# Altium PCB PCB_WeatherStation.PcbDoc (part 1 of 3)
Units mil, origin at the board's own origin, x right, y up, seen from the top; angles counter-clockwise.
Board outline 3900 x 3900 mil, 2 copper layers (Top Layer, Bottom Layer); 99 components, 57 nets, 297 pads, 308 vias.
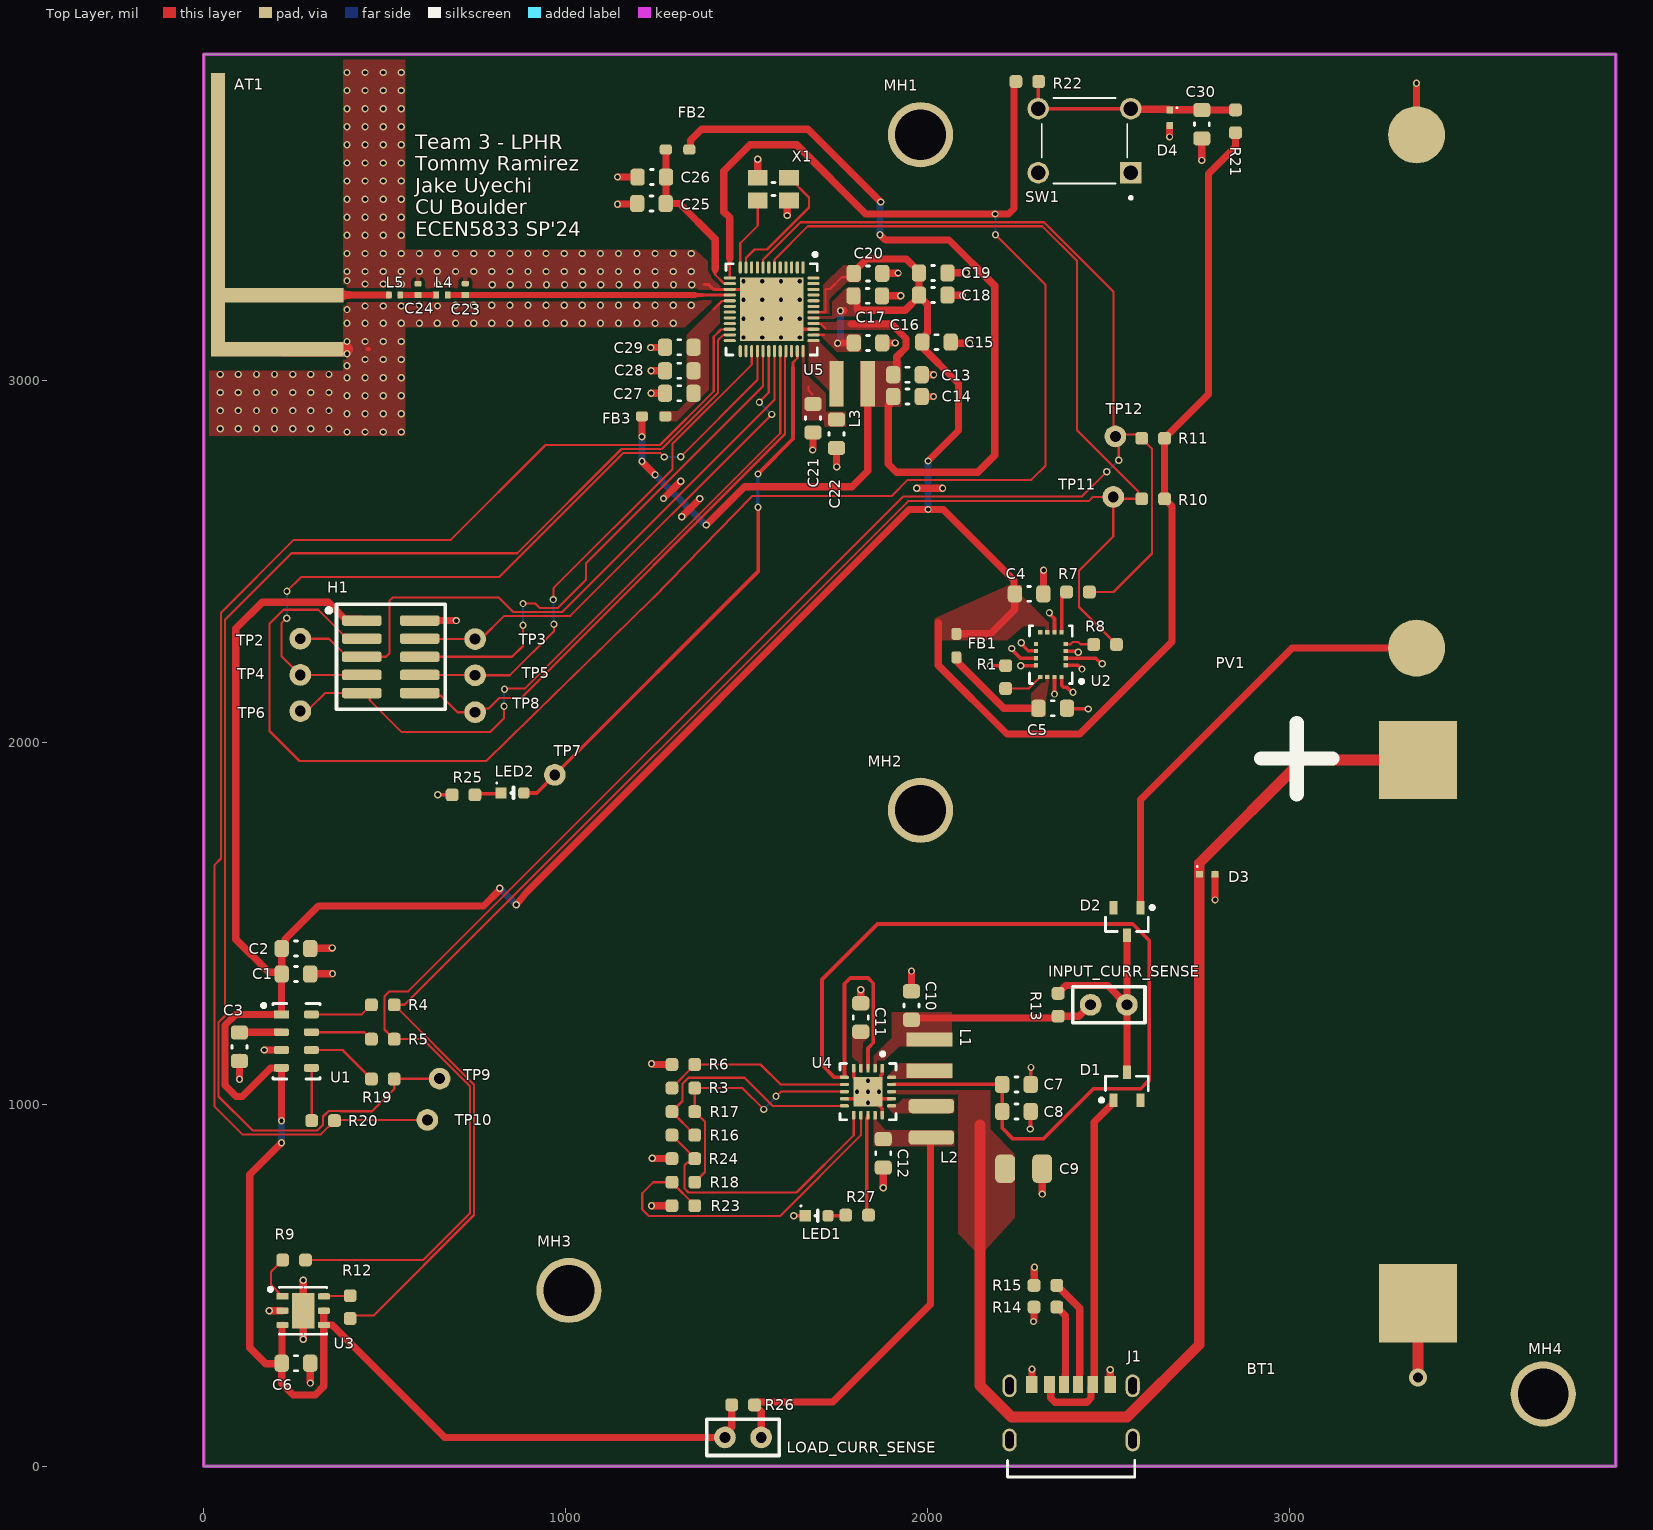
[diagram p0: Top Layer view]
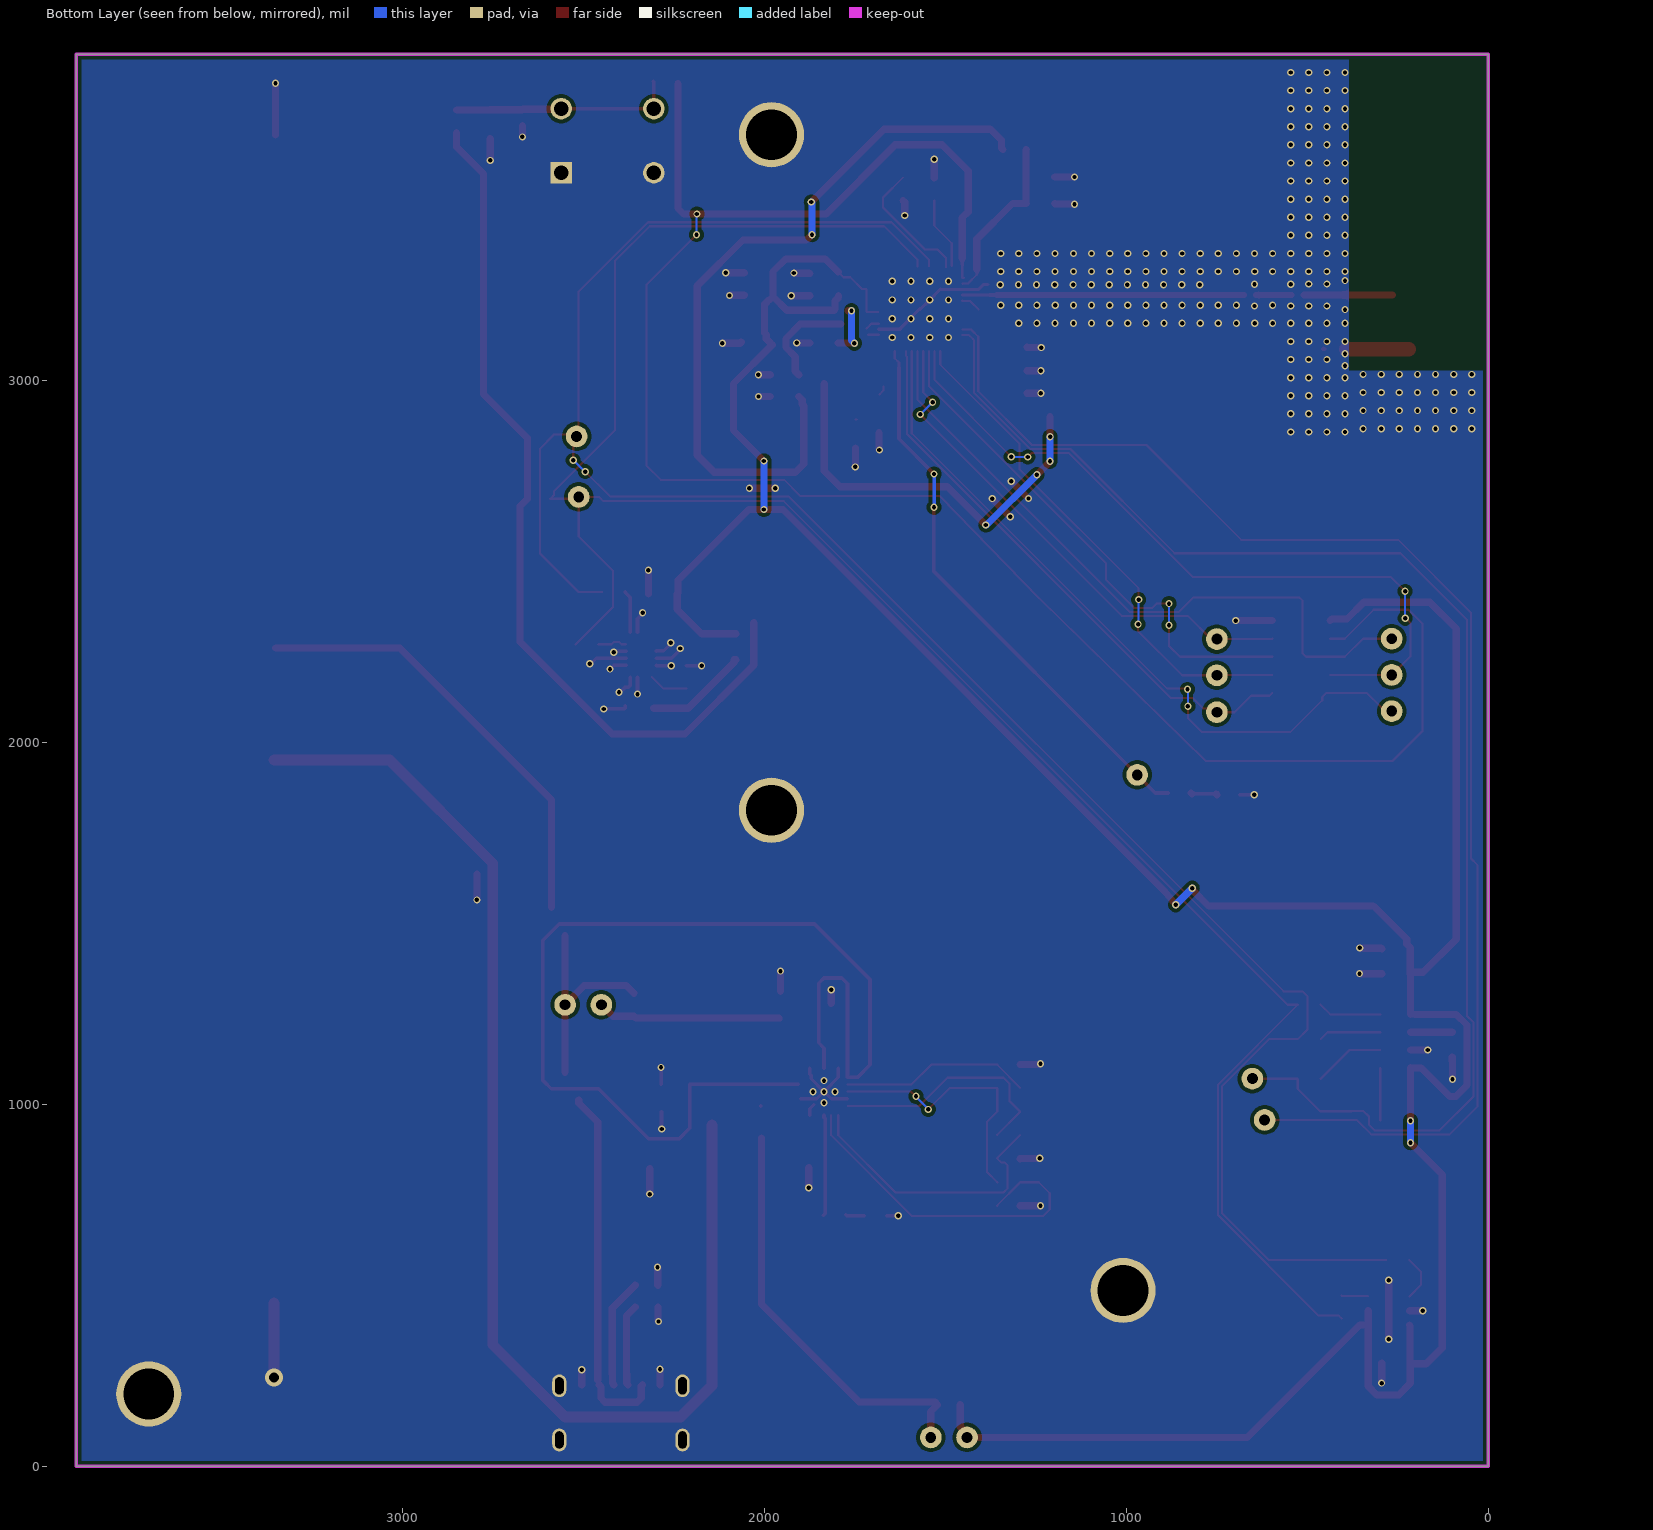
[diagram p1: Bottom Layer view, seen from below]
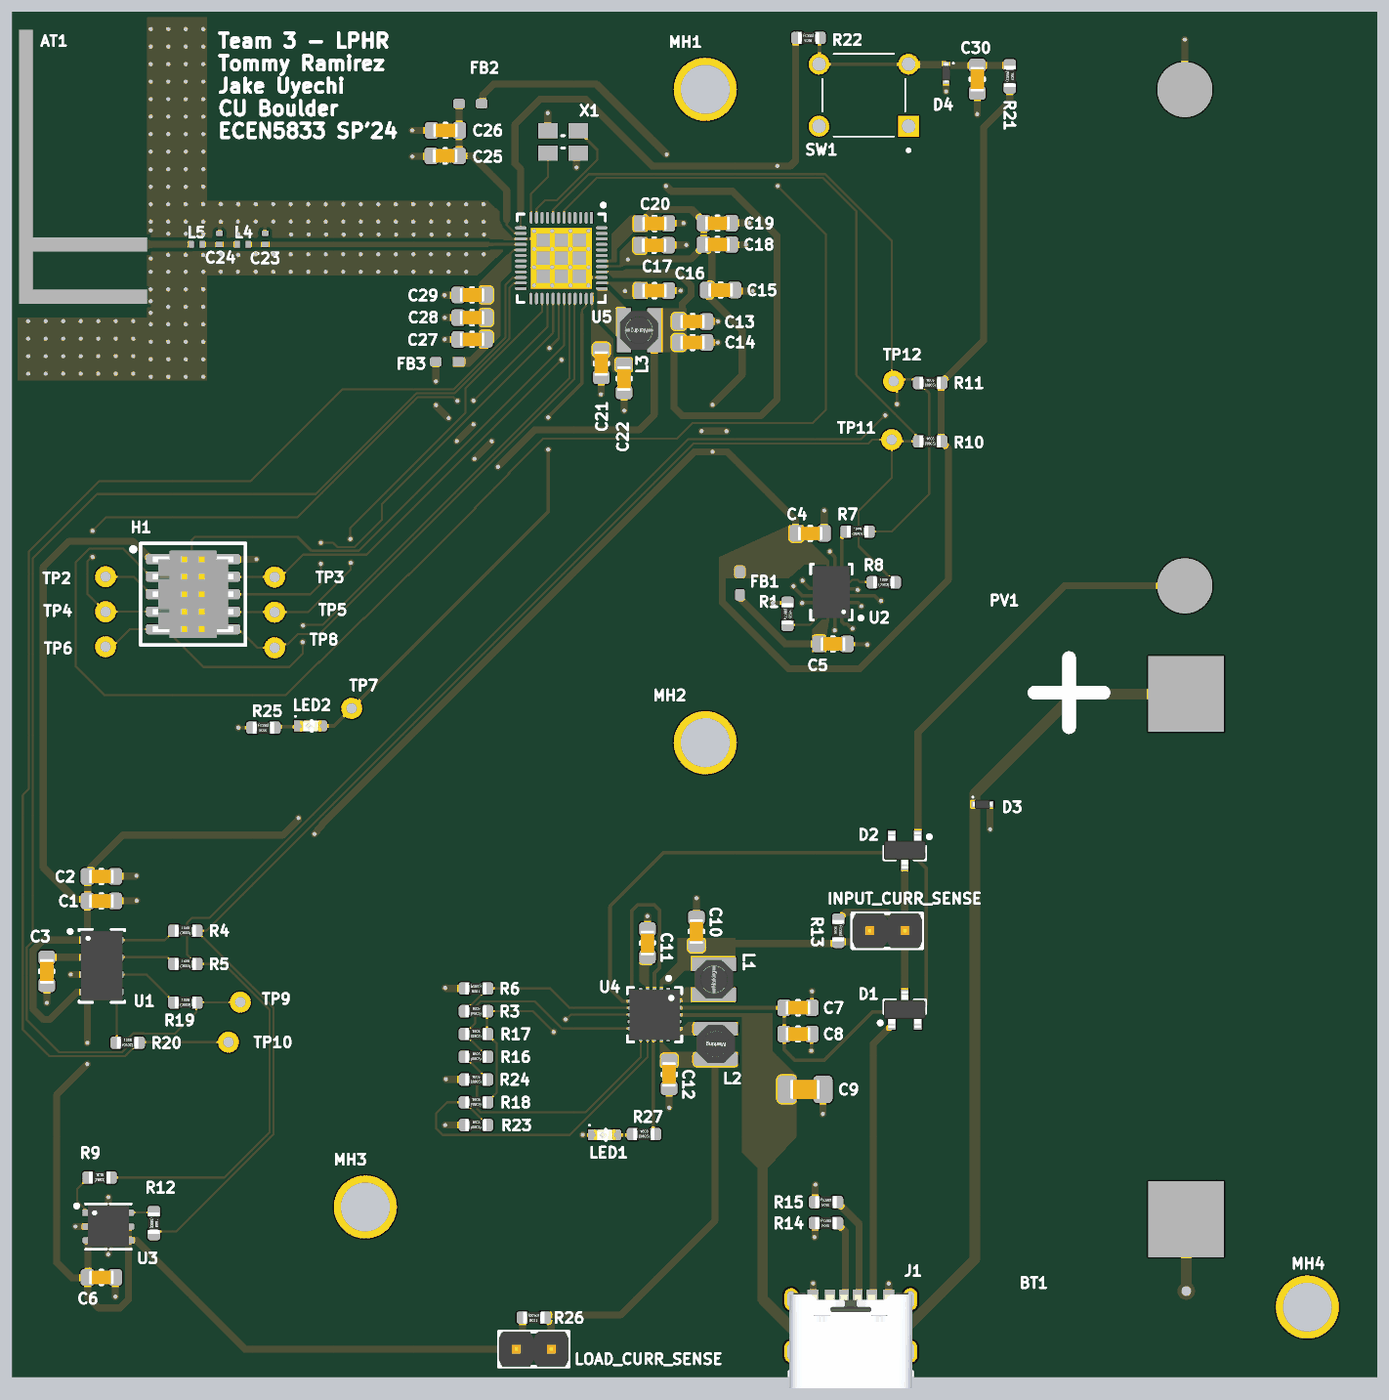
[diagram p3: 3D render of the assembled board from above, using the file's embedded part models]

## Layer stack, top to bottom
Top Solder: solder mask 0.4, Solder Resist, Dk 3.5
Top Layer: signal copper 1.4
Dielectric 1: dielectric 12.6, FR-4, Dk 4.8
Bottom Layer: signal copper 1.4
Bottom Solder: solder mask 0.4, Solder Resist, Dk 3.5

## Board outline
0,0 3900,0 3900,3900 0,3900

## Design rules (kind name [scope] priority, off if disabled: settings)
Clearance "Stitching No Net" [IsStitchingVia and InNet('No Net') vs (IsVia and (Not IsStitchingVia)) Or IsPad] p1: gap=50 ignorepadtopadclearanceinfootprint=FALSE
Clearance Clearance_1 [All] p2: gap=10 ignorepadtopadclearanceinfootprint=TRUE except(0: Arc-Hole Hole-Hole; 5: Track-Track; 5.91: Text-Hole; 6: Arc-Track Arc-SMDPad Arc-THPad Arc-Via Track-SMDPad Track-THPad; 19.68: SMDPad-THPad THPad-THPad Via-Hole)
Clearance Clearance_1 [OnMid vs OnMid] p3: gap=10 ignorepadtopadclearanceinfootprint=FALSE sourcerule=41 cellrowname=All cellrowtype=0 cellcolname=All cellcoltype=0 innerlayers=TRUE
Clearance Clearance_2 [(ExistsOnLayer('Top Layer') Or ExistsOnLayer('Bottom Layer')) vs (ExistsOnLayer('Top Layer') Or ExistsOnLayer('Bottom Layer'))] p4: gap=10 ignorepadtopadclearanceinfootprint=FALSE sourcerule=41 cellrowname=All cellrowtype=0 cellcolname=All cellcoltype=0 outerlayers=TRUE
Clearance [All] p5: gap=10 ignorepadtopadclearanceinfootprint=FALSE ismatrix=TRUE
HoleSize [All] p1: absolutevalues=TRUE maxlimit=140 minlimit=1 maxpercent=80.000 minpercent=20.000
MinimumSolderMaskSliver [All] p1: minsoldermaskwidth=3.94
NetAntennae [All] p1: netantennaetolerance=100
PolygonConnect PolygonConnectStyle_1 [IsNamedPolygon('GND_L01_P009')] p1: thpad.connectstyle=Relief thpad.reliefconductorwidth=10 thpad.reliefentries=2 thpad.polygonreliefangle="0 Angle" thpad.airgapwidth=10 smdpad.connectstyle=Relief smdpad.reliefconductorwidth=10 smdpad.reliefentries=2 smdpad.polygonreliefangle="0 Angle" smdpad.airgapwidth=10 via.connectstyle=Direct via.reliefconductorwidth=10 via.reliefentries=2 via.polygonreliefangle="0 Angle" via.airgapwidth=10
PolygonConnect [All] p2: connectstyle=Direct reliefconductorwidth=10 reliefentries=4 polygonreliefangle="90 Angle" airgapwidth=10
RoutingVias RoutingViaStyle_1 [All] p1: holewidth=12 width=20 viastyle="Through Hole" minholewidth=12 minwidth=20 maxholewidth=12 maxwidth=20
RoutingVias [All] p2: holewidth=28 width=50 viastyle="Through Hole" minholewidth=28 minwidth=50 maxholewidth=28 maxwidth=50
ShortCircuit [All] p1: allowed=TRUE
SilkToSolderMaskClearance [IsPad] p1: minsilkscreentomaskgap=5.91 clearancetoexposedcopper=TRUE
SolderMaskExpansion [All] p1: expansion=4 istentingtop=FALSE
Width MaxMinWidth_1 [All] p1: maxlimit=50 minlimit=5 preferedwidth=10 minimp=50.000000 maximp=50.000000 favimp=50.000000
Width [All] p2: maxlimit=10 minlimit=10 preferedwidth=10
25 further rules are at their usual default settings.

## Classes and differential pairs
component class Si7021: C6 R9 R12 U3
component class MPL3115A2: C1 C2 C3 R4 R5 R19 R20 U1
component class EFR32BG24_PartC: H1 LED2 MH1 MH2 MH3 MH4 R10 R11 R25 TP2 TP3 TP4 TP5 TP6 TP7 TP8 TP9 TP10 TP11 TP12
component class EFR32BG24_PartB: C13 C14 C15 C16 C17 C18 C19 C20 C21 C22 C30 D4 L3 R21 R22 SW1
component class EFR32BG24_PartA: AT1 C23 C24 C25 C26 C27 C28 C29 FB2 FB3 L4 L5 U5 X1
component class BQ25570: BT1 C7 C8 C9 C10 C11 C12 D1 D2 D3 INPUT_CURR_SENSE J1 L1 L2 LED1 LOAD_CURR_SENSE PV1 R3 R6 R13 R14 R15 R16 R17 R18 R23 R24 R26 R27 U4
component class AS7331: C4 C5 FB1 R1 R7 R8 U2

## Components (designator, comment, footprint, x,y, rotation, side; value= is the part's Value field where it differs from the comment)
AT1 "Inverted F" F_ANT 386,3066 r90 top
BT1 "3.7V" BT_25.4MMCOINCELL 3354,1201 r270 top
C1 "0.1uF" C_0603 255,1360 r0 top
C2 "1uF" C_0603 255,1430 r180 top
C3 "0.1uF" C_0603 99,1159 r270 top
C4 "0.1uF" C_0603 2280,2410 r180 top
C5 "0.1uF" C_0603 2345,2094 r0 top
C6 "0.1uF" C_0603 255,285 r0 top
C7 "4.7uF" C_0603 2245,1055 r0 top
C8 "10nF" C_0603 2245,980 r0 top
C9 "100uF" C_0805 2265,822 r0 top
C10 "4.7uF" C_0603 1955,1273 r90 top
C11 "10nF" C_0603 1815,1240 r90 top
C12 "22uF" C_0603 1877,864.63 r270 top
C13 "4.7uF" C_0603 1944,3015 r0 top
C14 "0.1uF" C_0603 1944,2955 r0 top
C15 "10uF" C_0603 2024,3105 r0 top
C16 "0.1uF" C_0603 1835,3103 r180 top
C17 "1uF" C_0603 1834,3233 r180 top
C18 "10nF" C_0603 2015,3235 r0 top
C19 "1uF" C_0603 2015,3296 r180 top
C20 "0.1uF" C_0603 1835,3295 r180 top
C21 "0.1uF" C_0603 1683.04,2895 r270 top
C22 "1uF" C_0603 1748,2852 r270 top
C23 "2.3pF" C_0402 722.78,3251 r90 top
C24 "1.6pF" C_0402 592.27,3251 r90 top
C25 "18pF" C_0603 1237,3488 r180 top
C26 "2.2uF" C_0603 1238,3561 r180 top
C27 "1uF" C_0603 1314,2964 r180 top
C28 "18pF" C_0603 1314,3026 r180 top
C29 "0.5pF" C_0603 1314,3091 r180 top
C30 "0.1uF" C_0603 2757,3707 r270 top
D1 "200mA" SOT95P237X111-3N 2550,1050 r90 top
D2 "200mA" SOT95P237X111-3N 2550,1505 r270 top
D3 "TVS 12V 7A" D_TVS 2772,1636 r0 top value=30pF
D4 "TVS 12V 7A" D_TVS 2668,3725 r270 top value=30pF
FB1 "70 Ohms @ 100 MHz" FB_0603 2079,2267 r270 top
FB2 "70 Ohms @ 100 MHz" FB_0603 1309,3637 r180 top
FB3 "70 Ohms @ 100 MHz" FB_0603 1243,2900 r0 top
H1 "Mini SWD" FTSH-105-01-XXX-DV-K 517,2236 r270 top
INPUT_CURR_SENSE "Input Current Sense" TP_2PIN_MALE 2500,1275 r180 top
J1 "Female USB Type C" GCT_USB4125-GF-A_REVA2 2395.92,104.5 r0 top
L1 "22uF" L_2828X30 2005,1136 r270 top
L2 "10u" L_2828_15 2010,951.69 r270 top
L3 "2.2uH" L_2828X30 1791,2990 r0 top
L4 "2.9uH" L_0402#1 658.63,3235.25 r180 top
L5 "1.2uH" L_0402#2 527.63,3235.25 r180 top
LED1 "GRN" LED_0603 1693,692 r0 top
LED2 "GRN" LED_0603 852.86,1859.94 r0 top
LOAD_CURR_SENSE "Load Current Sense" TP_2PIN_MALE 1490,80 r180 top
MH1 "#4 Hole" HOLE_#4#1 1966,3678 r0 top
MH2 "#4 Hole" HOLE_#4#2 1921,1812 r0 top
MH3 "#4 Hole" HOLE_#4#3 1009,486 r0 top
MH4 "#4 Hole" HOLE_#4#4 3709,177 r0 top
PV1 "4.15V" PV_CUSTOM 3350,2968.66 r90 top
R1 "3.3MΩ" R_0603 2215,2180 r270 top value=3.3MR
R3 "7.32 M" R_0603 1325,1045 r0 top value=7.32MR
R4 "0Ω" R_0603 495,1275 r0 top value=0R
R5 "0Ω" R_0603 495,1180 r0 top value=0R
R6 "5.62M" R_0603 1325,1110 r180 top value=5.62MR
R7 "0Ω" R_0603 2415,2415 r0 top value=0R
R8 "0Ω" R_0603 2490,2270 r0 top value=0R
R9 "0Ω" R_0603 250,570 r0 top value=0R
R10 "4.7k" R_0603 2622.5,2672.5 r0 top value=4.7kR
R11 "4.7k" R_0603 2622.5,2839.5 r0 top value=4.7kR
R12 "0Ω" R_0603 405,440 r270 top value=0R
R13 "500m" R_0603 2360,1275 r90 top value=500mR
R14 "5k1" R_0603 2325,440 r180 top value=5.1kR
R15 "5k1" R_0603 2325,500 r180 top value=5.1kR
R16 "7.5M" R_0603 1325,915 r0 top value=7.5MR
R17 "1.4M" R_0603 1325,980 r0 top value=1.4MR
R18 "8.25M" R_0603 1325,785 r0 top value=8.25MR
R19 "0Ω" R_0603 495,1070 r0 top value=0R
R20 "0Ω" R_0603 330,955 r0 top value=0R
R21 "47k" R_0603 2850,3715 r270 top value=47kR
R22 "140Ω" R_0603 2275,3825 r180 top value=140R
R23 "4.75M" R_0603 1325,720 r0 top value=4.75MR
R24 "4.32M" R_0603 1325,850 r0 top value=4.32MR
R25 "820Ω" R_0603 717.86,1854.94 r180 top value=820R
R26 "500m" R_0603 1490,170 r180 top value=500mR
R27 "820Ω" R_0603 1805,694 r0 top value=820R
SW1 "SW_TactilePushButton" SW_TACTILE 2437.95,3651.42 r180 top
TP2 "TP_1PIN_Hole" "Test Point"#1 267,2286 r90 top
TP3 "TP_1PIN_Hole" "Test Point"#2 749,2285 r90 top
TP4 "TP_1PIN_Hole" "Test Point"#1 267,2186 r90 top
TP5 "TP_1PIN_Hole" "Test Point"#2 749,2185 r90 top
TP6 "TP_1PIN_Hole" "Test Point"#1 267,2086 r90 top
TP7 "TP_1PIN_Hole" "Test Point"#1 970,1910 r90 top
TP8 "TP_1PIN_Hole" "Test Point"#3 745,2083 r90 top
TP9 "TP_1PIN_Hole" "Test Point"#1 652,1071 r90 top
TP10 "TP_1PIN_Hole" "Test Point"#1 618.01,956.79 r90 top
TP11 "TP_1PIN_Hole" "Test Point"#1 2512.5,2677.5 r90 top
TP12 "TP_1PIN_Hole" "Test Point"#1 2518.17,2844.67 r90 top
U1 "MPL3115A2" U_MPL3115A2 256.34,1174.61 r0 top
U2 "AS7331" U_AS7331 2340.16,2242.01 r180 top
U3 "SI7021-A20-GM1R" U_SI7021 275,430 r0 top
U4 "Buck Boost" U_20QFN_3.5X3.5 1835,1035 r270 top
U5 "EFR32BG24B110F1536IM48-B" U_48QFN_6X6_2 1568.86,3195.82 r270 top
X1 "38.4MHz" "33MHZ CRYSTAL" 1573.86,3527.94 r0 top

## Footprints (in the part's own frame and the unit in brackets; to place one, negate y for a bottom-side part, rotate by r counter-clockwise, add the part's x,y. Pads: shape width x height; smd on the part's side, far side on the other; paste and mask are expansions set on the pad)
"33MHZ CRYSTAL" [mm]
  rect 1.4x1.1 smd mask+0.06: 1(-1.1,-0.8) 3(1.1,0.8) 4(-1.1,0.8)
  rect 1.4x1.1 smd paste+0 mask+0.06: 2(1.1,-0.8)
  silkscreen extent -0.1,-0.45 0.1,0.45, body extent -1.7,-1.35 1.7,1.35, height 0.8
BT_25.4MMCOINCELL [mm]
  rect 5.5x5.5 smd: 1(-19.05,0) 2(19.05,0)
  silkscreen extent -21.65,-11 -16.65,-6
C_0402 [mm]
  rect 0.4x0.5 smd mask+0.06: 1(-0.4,0)
  rrect50% 0.4x0.5 smd mask+0.06: 2(0.4,0)
  body extent -0.53,-0.28 0.53,0.28, height 0.55
C_0603 [mm] "Chip Capacitor, 2-Leads, Body 1.60x0.80mm, IPC Medium Density"
  rrect50% 1x1.2 smd: 1(-1,0) 2(1,0)
  silkscreen extent -0.1,-0.53 0.1,0.53, body extent -0.9,-0.5 0.9,0.5, height 1
C_0805 [mm] "Chip Capacitor, 2-Leads, Body 2.00x1.25mm, IPC Medium Density"
  rrect50% 1.4x2 smd: 1(-1.3,0) 2(1.3,0)
  body extent -1.07,-0.7 1.07,0.7, height 1.4
D_TVS [mm] "SODFL, 2-Leads, Body 0.60x1.40mm, IPC Medium Density"
  rect 0.5x0.45 smd: 1(-0.55,0) 2(0.55,0)
  silkscreen extent -0.75,0.48 -0.65,0.57, body extent -0.7,-0.33 0.7,0.33, height 0.65
F_ANT [mil]
  rect 40x331 smd mask+4: FEED(169,165.5) GND(20,165.5)
  rect 782x39 smd mask+4: GND(391,346.5)
FB_0603 [mm]
  rrect50% 0.85x0.7 smd mask+0.06: 1(-0.825,0) 2(0.825,0)
  body extent -0.87,-0.48 0.87,0.48, height 0.65
FTSH-105-01-XXX-DV-K [mil]
  rrect50% 29x110 smd mask+2: 1(-100,-80) 2(-100,80) 3(-50,-80) 4(-50,80) 5(0,-80) 6(0,80) 7(50,-80) 8(50,80) 9(100,-80) 10(100,80)
  silkscreen extent -145,-177 145,150, body extent -125,-115 125,115, height 241
GCT_USB4125-GF-A_REVA2 [mm]
  rect 0.7x1.2 smd mask+0.051: A5(-0.5,3.08) B5(0.5,3.08)
  rect 0.76x1.2 smd mask+0.051: A9(1.52,3.08) B9(-1.52,3.08)
  rect 0.8x1.2 smd mask+0.051: A12(2.75,3.08) B12(-2.75,3.08)
  oval 1x1.6 hole 0.6 slot 1.2 at 90 deg mask+0: S1(-4.32,3) S2(4.32,3) S3(-4.32,-0.8) S4(4.32,-0.8)
  silkscreen extent -4.47,-3.4 4.47,-2.25, body extent -4.47,-3.45 4.47,3.45, height 3.26
HOLE_#4#1 [mil]
  round 180 hole 140: 1(14,0)
HOLE_#4#2 [mil]
  round 180 hole 140: 1(59,0)
HOLE_#4#3 [mil]
  round 180 hole 140: 1(0,0)
HOLE_#4#4 [mil]
  round 180 hole 140: 1(-9,23)
L_0402#1 [mm]
  rect 0.4x0.5 smd mask+0.06: 1(-0.4,0) 2(0.4,0)
  body extent -0.53,-0.28 0.53,0.28, height 0.55
L_0402#2 [mm]
  rect 0.4x0.5 smd mask+0.06: 1(-0.4,0)
  rrect50% 0.4x0.5 smd mask+0.06: 2(0.4,0)
  body extent -0.53,-0.28 0.53,0.28, height 0.55
L_2828_15 [mm]
  rrect50% 1x3.2 smd: 1(-1.1,0) 2(1.1,0)
  body extent -1.39,-1.39 1.39,1.39, height 1.2
L_2828X30 [mm]
  rect 1x3.2 smd: 1(-1.1,0) 2(1.1,0)
  body extent -1.4,-1.4 1.4,1.4, height 2.8
LED_0603 [mm] "SODFL, 2-Leads, Body 0.80x1.80mm, IPC Medium Density"
  rrect50% 0.8x0.8 smd: A(0.8,0)
  rect 0.8x0.8 smd: C(-0.8,0)
  silkscreen extent -1.15,-0.38 0.08,0.75, body extent -0.8,-0.4 0.8,0.4, height 0.71
PV_CUSTOM [mm] "Solar Panel"
  round 4 smd: 1(-18,0) 2(18,0)
R_0603 [mm] "Chip Resistor, 2-Leads, Body 1.60x0.80mm, IPC Medium Density"
  rrect50% 0.9x0.9 smd: 1(-0.8,0) 2(0.8,0)
  body extent -0.78,-0.43 0.77,0.42, height 0.45
SOT95P237X111-3N [mm] "SOT23, 3-Leads, Body 2.92x2.37mm, Pitch 0.95mm, IPC Medium Density"
  rect 0.95x0.56 smd: 1(-0.975,0.95) 2(-0.975,-0.95) 3(0.975,0)
  silkscreen extent -1.1,-1.5 0.7,1.9, body extent -1.32,-1.52 1.32,1.52, height 1.11
SW_TACTILE [mm] "Tactile, 4-pin pushbutton w/ through hole leads"
  rect 1.508x1.508 / inner round 1.508 / far side rect 1.508x1.508 hole 1: 1(-3.123,1.996)
  round 1.508 hole 1: 2(3.377,1.996) 3(-3.123,-2.504) 4(3.377,-2.504)
  silkscreen extent -3.22,-3.25 3.13,3.85
"Test Point"#1 [mil] "200 mil hole"
  round 60 hole 30: 1(0,0)
"Test Point"#2 [mil] "200 mil hole"
  round 60 hole 30: 1(0,-1)
"Test Point"#3 [mil] "200 mil hole"
  round 60 hole 30: 1(0,-5)
TP_2PIN_MALE [mil] "2-pin, standard male header, 2.54mm pitch"
  round 60 hole 30: 1(-50,0) 2(50,0)
  silkscreen extent -100,-50 100,50, body extent -100,-50 100,50, height 286
U_20QFN_3.5X3.5 [mm] "QFN Buckboost"
  rect 0.6x0.24 smd mask+0.07: 1(-1.65,1)
  rrect50% 0.6x0.24 smd mask+0.07: 2(-1.65,0.5) 3(-1.65,0) 4(-1.65,-0.5) 5(-1.65,-1) 11(1.65,-1) 12(1.65,-0.5) 13(1.65,0) 14(1.65,0.5) 15(1.65,1)
  rrect50% 0.24x0.6 smd mask+0.07: 6(-1,-1.65) 7(-0.5,-1.65) 8(0,-1.65) 9(0.5,-1.65) 10(1,-1.65) 16(1,1.65) 17(0.5,1.65) 18(0,1.65) 19(-0.5,1.65) 20(-1,1.65)
  rect 2.05x2.05 smd paste-1 mask+0.07: 21(0,0)
  silkscreen extent -2.77,-1.98 1.98,1.98, body extent -1.83,-1.83 1.83,1.83, height 1
U_48QFN_6X6_2 [mm]
  rect 0.86x0.22 smd mask+0.04: 1(-2.935,2.2)
  oval 0.86x0.22 smd mask+0.04: 2(-2.935,1.8) 3(-2.935,1.4) 4(-2.935,1) 5(-2.935,0.6) 6(-2.935,0.2) 7(-2.935,-0.2) 8(-2.935,-0.6) 9(-2.935,-1) 10(-2.935,-1.4) 11(-2.935,-1.8) 12(-2.935,-2.2) 25(2.935,-2.2) 26(2.935,-1.8) 27(2.935,-1.4) 28(2.935,-1) 29(2.935,-0.6) 30(2.935,-0.2) 31(2.935,0.2) 32(2.935,0.6) 33(2.935,1) 34(2.935,1.4) 35(2.935,1.8) 36(2.935,2.2)
  oval 0.22x0.86 smd mask+0.04: 13(-2.2,-2.935) 14(-1.8,-2.935) 15(-1.4,-2.935) 16(-1,-2.935) 17(-0.6,-2.935) 18(-0.2,-2.935) 19(0.2,-2.935) 20(0.6,-2.935) 21(1,-2.935) 22(1.4,-2.935) 23(1.8,-2.935) 24(2.2,-2.935) 37(2.2,2.935) 38(1.8,2.935) 39(1.4,2.935) 40(1,2.935) 41(0.6,2.935) 42(0.2,2.935) 43(-0.2,2.935) 44(-0.6,2.935) 45(-1,2.935) 46(-1.4,2.935) 47(-1.8,2.935) 48(-2.2,2.935)
  rect 4.45x4.45 smd paste-2539.97 mask+0.04: 49(0,0)
  silkscreen extent -3.97,-3.2 3.2,3.2, body extent -3.05,-3.05 3.05,3.05, height 0.9
U_AS7331 [mm] "QFN, 16-Leads, Body 2.60x3.65mm, Pitch 0.50mm, IPC Medium Density"
  rect 0.3x0.3 smd mask+0.048: 1(-0.75,1.575) 2(-0.25,1.575) 3(0.25,1.575) 4(0.75,1.575) 5(1.05,0.75) 6(1.05,0.25) 7(1.05,-0.25) 8(1.05,-0.75) 9(0.75,-1.575) 10(0.25,-1.575) 11(-0.25,-1.575) 12(-0.75,-1.575) 13(-1.05,-0.75) 14(-1.05,-0.25) 15(-1.05,0.25) 16(-1.05,0.75)
  silkscreen extent -2.28,-2.02 1.5,2.02, body extent -1.35,-1.88 1.35,1.88, height 1.19
U_MPL3115A2 [mm] "QFN, 8-Leads, Body 3.00x5.00mm, Pitch 0.00mm/1.25mm, IPC Medium Density"
  rect 1.05x0.55 smd mask+0.07: 1(-1.05,1.875)
  rrect50% 1.05x0.55 smd mask+0.07: 2(-1.05,0.625) 3(-1.05,-0.625) 4(-1.05,-1.875) 5(1.05,-1.875) 6(1.05,-0.625) 7(1.05,0.625) 8(1.05,1.875)
  silkscreen extent -2.42,-2.65 1.65,2.65, body extent -1.5,-2.5 1.5,2.5, height 1.1
U_SI7021 [mm] "QFN, 6-Leads, Body 3.00x3.00mm, Pitch 1.00mm, Thermal Pad 1.60x2.50mm, IPC Medium Density"
  rect 0.85x0.45 smd mask+0.062: 1(-1.45,1)
  rrect50% 0.85x0.45 smd mask+0.062: 2(-1.45,0) 3(-1.45,-1) 4(1.45,-1) 5(1.45,0) 6(1.45,1)
  rect 1.6x2.5 smd mask+0.062: Paddle(0,0)
  silkscreen extent -2.42,-1.65 1.65,1.65, body extent -1.5,-1.5 1.5,1.5, height 1.21

## Part data
AT1: library part Antenna
BT1: library part BT_CoinCell_25.4mm, "BATTERY HOLDER COIN 24.5MM SMD", Manufacturer="Memory Protection Devices", Manufacturer Part Number=BU2450SM-JJ-GTR, Supplier Part Number=BU2450SM-JJ-GCT-ND, Category=Uncategorized, ComponentLink1Description=https://datasheet.ciiva.com/4/bu2450sm-jj-gtr-datasheet-4338.pdf?src-supplier=Digikey, ComponentLink1URL=https://datasheet.ciiva.com/4/bu2450sm-jj-gtr-datasheet-4338.pdf?src-supplier=Digikey, ComponentLink2Description=https://datasheet.ciiva.com/4/bu2450sm-jj-gtr-datasheet-4339.pdf?src-supplier=Digikey, ComponentLink2URL=https://datasheet.ciiva.com/4/bu2450sm-jj-gtr-datasheet-4339.pdf?src-supplier=Digikey, ComponentLink3Description=https://datasheet.ciiva.com/4/bu2450sm-jj-gtr-datasheet-4340.pdf?src-supplier=Digikey, ComponentLink3URL=https://datasheet.ciiva.com/4/bu2450sm-jj-gtr-datasheet-4340.pdf?src-supplier=Digikey, Pricing="1=1.72, 10=1.445, 50=1.2702, 100=1.1967 (USD)", RoHS=Yes, Stock=49410, Supplier=Digikey
C1 C3 C4 C5 C6 C14 C16 C20 C21 C30: library part C_0.1U_0603, "CAP CER 0.1UF 10V X5R 0603", Capacitor Type=Ceramic, Manufacturer=KEMET, Manufacturer Part Number=C0603C104K8PAC7867, Supplier Part Number=399-17573-1-ND, Category="Ceramic Capacitors", ComponentLink1Description=https://datasheet.ciiva.com:443/pdfs/VipMasterIC/IC/KEME/KEME-S-A0007617622/KEME-S-A0007611556-1.pdf?src-supplier=IHS+Markit, ComponentLink1URL=https://datasheet.ciiva.com:443/pdfs/VipMasterIC/IC/KEME/KEME-S-A0007617622/KEME-S-A0007611556-1.pdf?src-supplier=IHS+Markit, ComponentLink2Description=https://api.kemet.com/component-edge/download/datasheet/C0603C104K8PAC7867.pdf?src-supplier=Digikey, ComponentLink2URL=https://api.kemet.com/component-edge/download/datasheet/C0603C104K8PAC7867.pdf?src-supplier=Digikey, Dielectric Material=Ceramic, Pins=2, Pricing="1=0.18, 10=0.119, 50=0.075, 100=0.06, 500=0.04332, 1000=0.03833 (USD)", Reach SVHC Compliant=Yes, RoHS=Yes, RoHS Compliant=Yes, Stock=13122, Supplier=Digikey
C2 C17 C19 C22 C27: library part C_1U_0603, "CAP CER 1UF 10V X5R 0603", Capacitor Type=Ceramic, Case/Package=0603, Manufacturer=Murata, Manufacturer Part Number=GRM188R61A105KA61D, Max Operating Temperature=85°C, Min Operating Temperature=-55°C, Package Shape=Rectangular, Package Style=SMTMeter, Rated DC Voltage (URdc)=10V, Supplier Part Number=490-1543-1-ND, Temperature Characteristics Code=X5R, Tolerance  (fill in as +-)=10%, Category="Ceramic Capacitors", ComponentLink1Description=https://psearch.en.murata.com:443/capacitor/product/GRM188R61A105KA61%23.pdf?src-supplier=IHS+Markit, ComponentLink1URL=https://psearch.en.murata.com:443/capacitor/product/GRM188R61A105KA61%23.pdf?src-supplier=IHS+Markit, ComponentLink2Description=https://datasheet.ciiva.com/19476/1857381-19476568.pdf?src-supplier=Jameco, ComponentLink2URL=https://datasheet.ciiva.com/19476/1857381-19476568.pdf?src-supplier=Jameco, ComponentLink3Description=https://datasheet.ciiva.com/18102/getdatasheetpartid-85467-18102910.pdf?src-supplier=Verical, ComponentLink3URL=https://datasheet.ciiva.com/18102/getdatasheetpartid-85467-18102910.pdf?src-supplier=Verical, ComponentLink4Description=https://datasheet.ciiva.com/7719/608985-7719036.pdf?src-supplier=Element14, ComponentLink4URL=https://datasheet.ciiva.com/7719/608985-7719036.pdf?src-supplier=Element14, ComponentLink5Description=https://datasheet.ciiva.com/22706/608985-22706782.pdf?src-supplier=Element14, ComponentLink5URL=https://datasheet.ciiva.com/22706/608985-22706782.pdf?src-supplier=Element14, ComponentLink6Description=https://datasheet.ciiva.com/131/partnumbering-e-01-131742.pdf?src-supplier=Digikey, ComponentLink6URL=https://datasheet.ciiva.com/131/partnumbering-e-01-131742.pdf?src-supplier=Digikey, ComponentLink7Description=https://datasheet.ciiva.com/131/partnumbering-e-01-131741.pdf?src-supplier=Digikey, ComponentLink7URL=https://datasheet.ciiva.com/131/partnumbering-e-01-131741.pdf?src-supplier=Digikey, ComponentLink8Description=https://datasheet.ciiva.com/131/partnumbering-e-01-131743.pdf?src-supplier=Digikey, ComponentLink8URL=https://datasheet.ciiva.com/131/partnumbering-e-01-131743.pdf?src-supplier=Digikey, ComponentLink9Description=https://datasheet.ciiva.com/16199/product-16199724.pdf?src-supplier=Future+Electronics, ComponentLink9URL=https://datasheet.ciiva.com/16199/product-16199724.pdf?src-supplier=Future+Electronics, Dielectric Material=Ceramic, Height=0.8mm, JESD-609 Code=e3, Length=1.6mm, Mounting Technology="Surface Mount", Multilayer=Yes, Packaging="Tape and Reel", Pins=2, Pricing="1=0.12, 10=0.08, 50=0.048, 100=0.0378, 500=0.02794, 1000=0.02313 (USD)", Reach SVHC Compliant=Yes, RoHS=Yes, RoHS Compliant=Yes, Stock=1314759, Supplier=Digikey, Terminal Finish=Nickel, Termination=Wraparound, Tolerance (fill in as +-)=10%, Width=0.8mm
C7 C10 C13: library part C_4.7U_0603, "CAP CER 4.7UF 10V X5R 0603", Capacitor Type=Ceramic, Case/Package=0603, Manufacturer=Murata, Manufacturer Part Number=GRM188R61A475KAAJD, Max Operating Temperature=85°C, Min Operating Temperature=-55°C, Package Shape=Rectangular, Rated DC Voltage (URdc)=10V, Supplier Part Number=490-14373-1-ND, Temperature Characteristics Code=X5R, Tolerance  (fill in as +-)=10%, Category="Ceramic Capacitors", ComponentLink1Description=https://datasheet.ciiva.com:443/pdfs/VipMasterIC/IC/MURE/MURE-S-A0004349797/MURE-S-A0004352595-1.pdf?src-supplier=IHS+Markit, ComponentLink1URL=https://datasheet.ciiva.com:443/pdfs/VipMasterIC/IC/MURE/MURE-S-A0004349797/MURE-S-A0004352595-1.pdf?src-supplier=IHS+Markit, ComponentLink2Description=http://search.murata.co.jp/Ceramy/image/img/A01X/G101/ENG/GRM188R61A475KAAJ-01.pdf?src-supplier=Digikey, ComponentLink2URL=http://search.murata.co.jp/Ceramy/image/img/A01X/G101/ENG/GRM188R61A475KAAJ-01.pdf?src-supplier=Digikey, Dielectric Material=Ceramic, JESD-609 Code=e3, Mounting Technology="Surface Mount", Multilayer=Yes, Packaging="Tape and Reel", Pins=2, Pricing="1=0.38, 10=0.251, 50=0.185, 100=0.1506, 500=0.11888, 1000=0.10039 (USD)", Reach SVHC Compliant=Yes, RoHS=Yes, RoHS Compliant=Yes, Stock=53982, Supplier=Digikey, Terminal Finish=Nickel, Termination=Wraparound, Tolerance (fill in as +-)=10%
C8 C11 C18: library part C_10N_0603, "Ceramic Capacitor, Multilayer, Ceramic, 100V, 10% +Tol, 10% -Tol, X7R, 15% TC, 0.01uF, Surface Mount, 0603", Capacitor Type=Ceramic, Case/Package=0603, Manufacturer=Murata, Manufacturer Part Number=GCM188R72A103KA37D, Max Operating Temperature=125°C, Min Operating Temperature=-55°C, Package Shape=Rectangular, Package Style=SMTMeter, Rated DC Voltage (URdc)=100V, Supplier Part Number=490-4781-6-ND, Temperature Characteristics Code=X7R, Tolerance  (fill in as +-)=10%, Category="Ceramic Capacitors", ComponentLink1Description=https://psearch.en.murata.com:443/capacitor/product/GCM188R72A103KA37%23.pdf?src-supplier=IHS+Markit, ComponentLink1URL=https://psearch.en.murata.com:443/capacitor/product/GCM188R72A103KA37%23.pdf?src-supplier=IHS+Markit, ComponentLink2Description=https://datasheet.ciiva.com/132/product-132908.pdf?src-supplier=Digikey, ComponentLink2URL=https://datasheet.ciiva.com/132/product-132908.pdf?src-supplier=Digikey, ComponentLink3Description=https://datasheet.ciiva.com/132/product-132907.pdf?src-supplier=Digikey, ComponentLink3URL=https://datasheet.ciiva.com/132/product-132907.pdf?src-supplier=Digikey, ComponentLink4Description=https://datasheet.ciiva.com/132/product-132909.pdf?src-supplier=Digikey, ComponentLink4URL=https://datasheet.ciiva.com/132/product-132909.pdf?src-supplier=Digikey, ComponentLink5Description=https://datasheet.ciiva.com/11786/0900766b80ef92d0-11786108.pdf?src-supplier=Rs, ComponentLink5URL=https://datasheet.ciiva.com/11786/0900766b80ef92d0-11786108.pdf?src-supplier=Rs, ComponentLink6Description=https://datasheet.ciiva.com/16497/product-16497251.pdf?src-supplier=Future+Electronics, ComponentLink6URL=https://datasheet.ciiva.com/16497/product-16497251.pdf?src-supplier=Future+Electronics, ComponentLink7Description=https://datasheet.ciiva.com/18183/getdatasheetpartid-178890-18183651.pdf?src-supplier=Verical, ComponentLink7URL=https://datasheet.ciiva.com/18183/getdatasheetpartid-178890-18183651.pdf?src-supplier=Verical, ComponentLink8Description=https://datasheet.ciiva.com/11619/product-11619719.pdf?src-supplier=Avnet, ComponentLink8URL=https://datasheet.ciiva.com/11619/product-11619719.pdf?src-supplier=Avnet, Dielectric Material=Ceramic, Height=0.9mm, JESD-609 Code=e3, Length=1.6mm, Mounting Technology="Surface Mount", Multilayer=Yes, Packaging="Tape and Reel", Pins=2, Pricing="1=0.1, 10=0.038, 50=0.0218, 100=0.0168, 500=0.01268, 1000=0.00996 (USD)", Reach SVHC Compliant=Yes, Reference Standard=AEC-Q200, RoHS=Yes, RoHS Compliant=Yes, Stock=7901608, Supplier=Digikey, Terminal Finish=Nickel, Termination=Wraparound, Tolerance (fill in as +-)=10%, Width=0.8mm
C9: library part C_100U_0805, "CAP CER 100UF 6.3V X5R 0805", Capacitor Type=Ceramic, Case/Package=0805, Manufacturer=Murata, Manufacturer Part Number=GRM21BR60J107ME15L, Max Operating Temperature=85°C, Min Operating Temperature=-55°C, Package Shape=Rectangular, Rated DC Voltage (URdc)=6.3V, Supplier Part Number=490-13981-1-ND, Temperature Characteristics Code=X5R, Tolerance  (fill in as +-)=20%, Category="Ceramic Capacitors", ComponentLink1Description=https://datasheet.ciiva.com:443/pdfs/VipMasterIC/IC/MURE/MURE-S-A0004349797/MURE-S-A0004361963-1.pdf?src-supplier=IHS+Markit, ComponentLink1URL=https://datasheet.ciiva.com:443/pdfs/VipMasterIC/IC/MURE/MURE-S-A0004349797/MURE-S-A0004361963-1.pdf?src-supplier=IHS+Markit, ComponentLink2Description=http://www.farnell.com/datasheets/1957830.pdf?src-supplier=Farnell, ComponentLink2URL=http://www.farnell.com/datasheets/1957830.pdf?src-supplier=Farnell, ComponentLink3Description=https://datasheet.octopart.com/GRM21BR60J107ME15L-Murata-datasheet-48012791.pdf?src-supplier=Element14, ComponentLink3URL=https://datasheet.octopart.com/GRM21BR60J107ME15L-Murata-datasheet-48012791.pdf?src-supplier=Element14, ComponentLink4Description=http://www.farnell.com/datasheets/1957830.pdf?src-supplier=Element14, ComponentLink4URL=http://www.farnell.com/datasheets/1957830.pdf?src-supplier=Element14, ComponentLink5Description=https://search.murata.co.jp/Ceramy/image/img/A01X/G101/ENG/GRM21BR60J107ME15-01.pdf?src-supplier=Digikey, ComponentLink5URL=https://search.murata.co.jp/Ceramy/image/img/A01X/G101/ENG/GRM21BR60J107ME15-01.pdf?src-supplier=Digikey, ComponentLink6Description=https://datasheet.octopart.com/GRM21BR60J107ME15L-Murata-datasheet-62287462.pdf?src-supplier=Future+Electronics, ComponentLink6URL=https://datasheet.octopart.com/GRM21BR60J107ME15L-Murata-datasheet-62287462.pdf?src-supplier=Future+Electronics, ComponentLink7Description=http://www.farnell.com/datasheets/1957830.pdf?src-supplier=Newark, ComponentLink7URL=http://www.farnell.com/datasheets/1957830.pdf?src-supplier=Newark, ComponentLink8Description=https://datasheet.octopart.com/GRM21BR60J107ME15L-Murata-datasheet-165579666.pdf?src-supplier=TME, ComponentLink8URL=https://datasheet.octopart.com/GRM21BR60J107ME15L-Murata-datasheet-165579666.pdf?src-supplier=TME, Dielectric Material=Ceramic, JESD-609 Code=e3, Mounting Technology="Surface Mount", Multilayer=Yes, Packaging="Tape and Reel", Pins=2, Pricing="1=1.15, 10=0.863, 50=0.7874, 100=0.645, 500=0.5148, 1000=0.45423 (USD)", Reach SVHC Compliant=Yes, RoHS=Yes, RoHS Compliant=Yes, Stock=216821, Supplier=Digikey, Terminal Finish=Nickel, Termination=Wraparound, Tolerance (fill in as +-)=20%
C12: library part C_22U_0603, "CAP CER 22UF 10V X5R 0603", Capacitance="22 uF", Case Code - in=0603, Case Code - mm=1608, Dielectric=X5R, Manufacturer=Murata, Manufacturer Part Number=GRM188R61A226ME15D, Maximum Operating Temperature="+ 85 C", Minimum Operating Temperature="- 55 C", Package / Case="0603 (1608 metric)", Supplier Part Number 1=490-10476-1-ND, Tolerance="20 %", Voltage Rating DC="10 VDC", Brand="Murata Electronics", ComponentLink1Description=http://www.farnell.com/datasheets/2047978.pdf?src-supplier=Element14, ComponentLink1URL=http://www.farnell.com/datasheets/2047978.pdf?src-supplier=Element14, Factory Pack Quantity=4000, Height="0.8 mm", Length="1.6 mm", Packaging=Reel, Pricing 1="1=0.33, 10=0.226, 50=0.1506, 100=0.1279, 500=0.0903, 1000=0.079 (USD)", Product="General Type MLCCs", Product Category="Multilayer Ceramic Capacitors MLCC - SMD/SMT", RoHS=True, Series=GRM, Stock 1=849458, Supplier 1=Digi-Key, Termination Style=SMD/SMT, Type="Voltage and Temperature Derating Recommended Product", Unit Weight="0.000222 oz", Width="0.8 mm"
C15: library part C_10U_0603, "CAP CER 10UF 10V X5R 0603", Capacitor Type=Ceramic, Case/Package=0603, Manufacturer=Murata, Manufacturer Part Number=GRM188R61A106ME69D, Max Operating Temperature=85°C, Min Operating Temperature=-55°C, Package Shape=Rectangular, Rated DC Voltage (URdc)=10V, Supplier Part Number=490-10475-1-ND, Temperature Characteristics Code=X5R, Tolerance  (fill in as +-)=20%, Category="Ceramic Capacitors", ComponentLink1Description=https://datasheet.ciiva.com:443/pdfs/VipMasterIC/IC/MURE/MURE-S-A0004349797/MURE-S-A0004352786-1.pdf?src-supplier=IHS+Markit, ComponentLink1URL=https://datasheet.ciiva.com:443/pdfs/VipMasterIC/IC/MURE/MURE-S-A0004349797/MURE-S-A0004352786-1.pdf?src-supplier=IHS+Markit, ComponentLink2Description=http://www.farnell.com/datasheets/1872210.pdf?src-supplier=Farnell, ComponentLink2URL=http://www.farnell.com/datasheets/1872210.pdf?src-supplier=Farnell, ComponentLink3Description=http://www.mouser.com/ds/2/281/c02e-2905.pdf?src-supplier=Mouser, ComponentLink3URL=http://www.mouser.com/ds/2/281/c02e-2905.pdf?src-supplier=Mouser, ComponentLink4Description=https://datasheet.octopart.com/GRM188R61A106ME69D-Murata-datasheet-22122223.pdf?src-supplier=Future+Electronics, ComponentLink4URL=https://datasheet.octopart.com/GRM188R61A106ME69D-Murata-datasheet-22122223.pdf?src-supplier=Future+Electronics, ComponentLink5Description=https://datasheet.octopart.com/GRM188R61A106ME69D-Murata-datasheet-62317187.pdf?src-supplier=Element14, ComponentLink5URL=https://datasheet.octopart.com/GRM188R61A106ME69D-Murata-datasheet-62317187.pdf?src-supplier=Element14, ComponentLink6Description=http://www.farnell.com/datasheets/1872210.pdf?src-supplier=Newark, ComponentLink6URL=http://www.farnell.com/datasheets/1872210.pdf?src-supplier=Newark, ComponentLink7Description=http://www.farnell.com/datasheets/2048014.pdf?src-supplier=Element14, ComponentLink7URL=http://www.farnell.com/datasheets/2048014.pdf?src-supplier=Element14, ComponentLink8Description=https://datasheet.octopart.com/GRM188R61A106ME69D-Murata-datasheet-165579666.pdf?src-supplier=TME, ComponentLink8URL=https://datasheet.octopart.com/GRM188R61A106ME69D-Murata-datasheet-165579666.pdf?src-supplier=TME, Dielectric Material=Ceramic, JESD-609 Code=e3, Mounting Technology="Surface Mount", Multilayer=Yes, Packaging="Tape and Reel", Pins=2, Pricing="1=0.14, 10=0.098, 50=0.0584, 100=0.0459, 500=0.03392, 1000=0.02809 (USD)", Reach SVHC Compliant=Yes, RoHS=Yes, RoHS Compliant=Yes, Stock=841748, Supplier=Digikey, Terminal Finish=Nickel, Termination=Wraparound, Tolerance (fill in as +-)=20%
C23: library part C_2P3_0402, "Ceramic Capacitor, Multilayer, Ceramic, 50V, 4.35% +Tol, 4.35% -Tol, C0G, 30ppm/Cel TC, 0.0000023uF, Surface Mount, 0402", Capacitor Type=Ceramic, Case/Package=0402, Manufacturer=Murata, Manufacturer Part Number=GJM1555C1H2R3BB01D, Max Operating Temperature=125°C, Min Operating Temperature=-55°C, Package Shape=Rectangular, Package Style=SMTMeter, Rated DC Voltage (URdc)=50V, Supplier Part Number=490-GJM1555C1H2R3BB01DCT-ND, Temperature Characteristics Code=C0G, Tolerance  (fill in as +-)=4.35%, Category="Ceramic Capacitors", ComponentLink1Description=https://datasheet.ciiva.com:443/pdfs/VipMasterIC/IC/MURE/MURE-S-A0004378008/MURE-S-A0004382787-1.pdf?src-supplier=IHS+Markit, ComponentLink1URL=https://datasheet.ciiva.com:443/pdfs/VipMasterIC/IC/MURE/MURE-S-A0004378008/MURE-S-A0004382787-1.pdf?src-supplier=IHS+Markit, ComponentLink2Description=https://datasheet.ciiva.com/166/product-166998.pdf?src-supplier=Digikey, ComponentLink2URL=https://datasheet.ciiva.com/166/product-166998.pdf?src-supplier=Digikey, Dielectric Material=Ceramic, Height=0.5mm, JESD-609 Code=e3, Length=1mm, Mounting Technology="Surface Mount", Multilayer=Yes, Packaging="Tape and Reel", Pins=2, Pricing="1=0.1, 10=0.068, 50=0.0406, 100=0.0319, 500=0.02356, 1000=0.01951, 2500=0.01815, 5000=0.01661 (USD)", Reach SVHC Compliant=Yes, RoHS=Yes, RoHS Compliant=Yes, Stock=30945, Supplier=Digikey, Terminal Finish=Nickel, Termination=Wraparound, Tolerance (fill in as +-)=4.35%, Width=0.5mm
C24: library part C_1P6_0402, "Ceramic Capacitor, Multilayer, Ceramic, 50V, 15.62% +Tol, 15.62% -Tol, C0G, 30ppm/Cel TC, 0.0000016uF, Surface Mount, 0402", Capacitor Type=Ceramic, Case/Package=0402, Manufacturer=Murata, Manufacturer Part Number=GJM1555C1H1R6CB01D, Max Operating Temperature=125°C, Min Operating Temperature=-55°C, Package Shape=Rectangular, Package Style=SMTMeter, Rated DC Voltage (URdc)=50V, Supplier Part Number=490-3088-1-ND, Temperature Characteristics Code=C0G, Tolerance  (fill in as +-)=15.62%, Category="Ceramic Capacitors", ComponentLink1Description=https://datasheet.ciiva.com:443/pdfs/VipMasterIC/IC/MURE/MURE-S-A0004378008/MURE-S-A0004382877-1.pdf?src-supplier=IHS+Markit, ComponentLink1URL=https://datasheet.ciiva.com:443/pdfs/VipMasterIC/IC/MURE/MURE-S-A0004378008/MURE-S-A0004382877-1.pdf?src-supplier=IHS+Markit, ComponentLink2Description=https://datasheet.ciiva.com/161/product-161712.pdf?src-supplier=Digikey, ComponentLink2URL=https://datasheet.ciiva.com/161/product-161712.pdf?src-supplier=Digikey, ComponentLink3Description=https://datasheet.ciiva.com/16440/gjm1555c1h1r6cb01d-16440474.pdf?src-supplier=Future+Electronics, ComponentLink3URL=https://datasheet.ciiva.com/16440/gjm1555c1h1r6cb01d-16440474.pdf?src-supplier=Future+Electronics, ComponentLink4Description=https://datasheet.ciiva.com/161/partnumbering-e-01-161713.pdf?src-supplier=Digikey, ComponentLink4URL=https://datasheet.ciiva.com/161/partnumbering-e-01-161713.pdf?src-supplier=Digikey, ComponentLink5Description=https://datasheet.ciiva.com/161/partnumbering-e-01-161714.pdf?src-supplier=Digikey, ComponentLink5URL=https://datasheet.ciiva.com/161/partnumbering-e-01-161714.pdf?src-supplier=Digikey, Dielectric Material=Ceramic, Height=0.5mm, JESD-609 Code=e3, Length=1mm, Mounting Technology="Surface Mount", Multilayer=Yes, Packaging="Tape and Reel", Pins=2, Pricing="1=0.1, 10=0.047, 50=0.0272, 100=0.0211, 500=0.01586, 1000=0.01246, 2500=0.01133, 5000=0.01042 (USD)", Reach SVHC Compliant=Yes, RoHS=Yes, RoHS Compliant=Yes, Stock=26859, Supplier=Digikey, Terminal Finish=Nickel, Termination=Wraparound, Tolerance (fill in as +-)=15.62%, Width=0.5mm
C25 C28: library part C_18P_0603, "Ceramic Capacitor, Multilayer, Ceramic, 50V, 5% +Tol, 5% -Tol, C0G, 30ppm/Cel TC, 0.000018uF, Surface Mount, 0603", Capacitor Type=Ceramic, Case/Package=0603, Manufacturer=KEMET, Manufacturer Part Number=C0603C180J5GACTU, Max Operating Temperature=125°C, Min Operating Temperature=-55°C, Package Shape=Rectangular, Package Style=SMTMeter, Rated DC Voltage (URdc)=50V, Supplier Part Number=399-C0603C180J5GAC7867CT-ND, Temperature Characteristics Code=C0G, Tolerance  (fill in as +-)=5%, Category="Ceramic Capacitors", ComponentLink1Description=https://datasheet.ciiva.com:443/pdfs/VipMasterIC/IC/KEME/KEME-S-A0007622587/KEME-S-A0007623064-1.pdf?src-supplier=IHS+Markit, ComponentLink1URL=https://datasheet.ciiva.com:443/pdfs/VipMasterIC/IC/KEME/KEME-S-A0007622587/KEME-S-A0007623064-1.pdf?src-supplier=IHS+Markit, ComponentLink2Description=https://datasheet.ciiva.com/7824/1372242-7824010.pdf?src-supplier=Element14, ComponentLink2URL=https://datasheet.ciiva.com/7824/1372242-7824010.pdf?src-supplier=Element14, ComponentLink3Description=https://datasheet.ciiva.com/7824/f9080b-0402-series-c0g-7824009.pdf?src-supplier=Element14, ComponentLink3URL=https://datasheet.ciiva.com/7824/f9080b-0402-series-c0g-7824009.pdf?src-supplier=Element14, Dielectric Material=Ceramic, Height=0.8mm, JESD-609 Code=e3, Length=1.6mm, Mounting Technology="Surface Mount", Multilayer=Yes, Packaging="Tape and Reel", Pins=2, Pricing="1=0.1, 10=0.037, 50=0.0212, 100=0.0164, 500=0.01238, 1000=0.00972 (USD)", Reach SVHC Compliant=Yes, RoHS=Yes, RoHS Compliant=Yes, Stock=391868, Supplier=Digikey, Terminal Finish=Nickel, Termination=Wraparound, Tolerance (fill in as +-)=5%, Width=0.8mm
C26: library part C_2U2_0603, "Ceramic Capacitor, Multilayer, Ceramic, 10V, 10% +Tol, 10% -Tol, X7R, 15% TC, 2.2uF, Surface Mount, 0603", Capacitor Type=Ceramic, Case/Package=0603, Manufacturer=Samsung, Manufacturer Part Number=CL10B225KP8NNNC, Max Operating Temperature=125°C, Min Operating Temperature=-55°C, Package Shape=Rectangular, Package Style=SMTMeter, Rated DC Voltage (URdc)=10V, Supplier Part Number=1276-1134-1-ND, Temperature Characteristics Code=X7R, Tolerance  (fill in as +-)=10%, Category="Ceramic Capacitors", ComponentLink1Description=https://datasheet.ciiva.com:443/pdfs/VipMasterIC/IC/SEMS/SEMS-S-A0008384515/SEMS-S-A0008873307-1.pdf?src-supplier=IHS+Markit, ComponentLink1URL=https://datasheet.ciiva.com:443/pdfs/VipMasterIC/IC/SEMS/SEMS-S-A0008384515/SEMS-S-A0008873307-1.pdf?src-supplier=IHS+Markit, ComponentLink2Description=https://datasheet.ciiva.com/15227/getdatasheetpartid-359568-15227195.pdf?src-supplier=Verical, ComponentLink2URL=https://datasheet.ciiva.com/15227/getdatasheetpartid-359568-15227195.pdf?src-supplier=Verical, ComponentLink3Description=https://datasheet.ciiva.com/25798/cl10b225kp8nnnc-25798914.pdf?src-supplier=Digikey, ComponentLink3URL=https://datasheet.ciiva.com/25798/cl10b225kp8nnnc-25798914.pdf?src-supplier=Digikey, ComponentLink4Description=https://datasheet.ciiva.com/16500/cl10b225kp8nnnc-16500695.pdf?src-supplier=Future+Electronics, ComponentLink4URL=https://datasheet.ciiva.com/16500/cl10b225kp8nnnc-16500695.pdf?src-supplier=Future+Electronics, ComponentLink5Description=https://datasheet.ciiva.com/29198/457933-da-01-en-vs-kondensator-0603-29198589.pdf?src-supplier=Conrad, ComponentLink5URL=https://datasheet.ciiva.com/29198/457933-da-01-en-vs-kondensator-0603-29198589.pdf?src-supplier=Conrad, Dielectric Material=Ceramic, Height=0.9mm, JESD-609 Code=e3, Length=1.6mm, Mounting Technology="Surface Mount", Multilayer=Yes, Packaging="Tape and Reel", Pins=2, Pricing="1=0.1, 10=0.07, 50=0.0418, 100=0.0329, 500=0.02428, 1000=0.0201 (USD)", Reach SVHC Compliant=Yes, RoHS=Yes, RoHS Compliant=Yes, Stock=1035354, Supplier=Digikey, Terminal Finish=Nickel, Termination=Wraparound, Tolerance (fill in as +-)=10%, Width=0.8mm
C29: library part C_0P5_0603, "Cap Cer 0.5PF 250V C0G/NP0 0603", Manufacturer=Johanson, Manufacturer Part Number=QSCP251Q0R5A1GV001T, Supplier Part Number=712-QSCP251Q0R5A1GV001TCT-ND, Category="Ceramic Capacitors", Pricing="1=0.36, 10=0.237, 50=0.1746, 100=0.1422, 500=0.11226, 1000=0.0948 (USD)", RoHS=No, Stock=12633, Supplier=Digikey
D1 D2: library part D_200m, "Rectifier Diode, Schottky, 1 Phase, 1 Element, 0.2A, 30V V(RRM), Silicon, TO-236", Forward Voltage=1V, Manufacturer="ON Semiconductor", Manufacturer Part Number=BAT54LT1G, Max Operating Temperature=125°C, Max Power Dissipation=200mW, Min Operating Temperature=-55°C, Package Body Material=Plastic, Package Shape=Rectangular, Package Style="SMALL OUTLINEMeter", Peak Reflow Temperature (Cel)=260°C, Rep Pk Reverse Voltage-Max=30V, Supplier Part Number=BAT54LT1GOSCT-ND, Time @ Peak Reflow Temperature-Max (s)=40s, Category="Schottky Diodes", ComponentLink1Description=https://datasheet.ciiva.com:443/pdfs/VipMasterIC/IC/ONSM/ONSM-S-A0005932371/ONSM-S-A0005932371-1.pdf?src-supplier=IHS+Markit, ComponentLink1URL=https://datasheet.ciiva.com:443/pdfs/VipMasterIC/IC/ONSM/ONSM-S-A0005932371/ONSM-S-A0005932371-1.pdf?src-supplier=IHS+Markit, ComponentLink2Description=https://datasheet.ciiva.com/7962/bat54lt1-d-7962967.pdf?src-supplier=Element14, ComponentLink2URL=https://datasheet.ciiva.com/7962/bat54lt1-d-7962967.pdf?src-supplier=Element14, ComponentLink3Description=https://datasheet.ciiva.com/8299/bat54lt1-d-8299649.pdf?src-supplier=Avnet, ComponentLink3URL=https://datasheet.ciiva.com/8299/bat54lt1-d-8299649.pdf?src-supplier=Avnet, ComponentLink4Description=https://datasheet.ciiva.com/1180/bat54lt1-d-1180300.pdf?src-supplier=Element14, ComponentLink4URL=https://datasheet.ciiva.com/1180/bat54lt1-d-1180300.pdf?src-supplier=Element14, ComponentLink5Description=https://datasheet.ciiva.com/1180/bat54lt1-d-1180299.pdf?src-supplier=Element14, ComponentLink5URL=https://datasheet.ciiva.com/1180/bat54lt1-d-1180299.pdf?src-supplier=Element14, ComponentLink6Description=https://datasheet.ciiva.com/28381/bat54lt1-d-28381274.pdf?src-supplier=Element14, ComponentLink6URL=https://datasheet.ciiva.com/28381/bat54lt1-d-28381274.pdf?src-supplier=Element14, ComponentLink7Description=https://datasheet.ciiva.com/14559/70099483-14559786.pdf?src-supplier=Allied+Electronics, ComponentLink7URL=https://datasheet.ciiva.com/14559/70099483-14559786.pdf?src-supplier=Allied+Electronics, ComponentLink8Description=https://datasheet.ciiva.com/8299/bat54lt1-d-8299979.pdf?src-supplier=Avnet, ComponentLink8URL=https://datasheet.ciiva.com/8299/bat54lt1-d-8299979.pdf?src-supplier=Avnet, ComponentLink9Description=https://datasheet.ciiva.com/16421/bat54lt1-d-16421631.pdf?src-supplier=Future+Electronics, ComponentLink9URL=https://datasheet.ciiva.com/16421/bat54lt1-d-16421631.pdf?src-supplier=Future+Electronics, ComponentLink10Description=https://datasheet.ciiva.com/915/bat54lt1-d-915396.pdf?src-supplier=Digikey, ComponentLink10URL=https://datasheet.ciiva.com/915/bat54lt1-d-915396.pdf?src-supplier=Digikey, ComponentLink11Description=https://datasheet.ciiva.com/915/bat54lt1-d-915397.pdf?src-supplier=Digikey, ComponentLink11URL=https://datasheet.ciiva.com/915/bat54lt1-d-915397.pdf?src-supplier=Digikey, ComponentLink12Description=https://datasheet.ciiva.com/915/bat54lt1-d-915395.pdf?src-supplier=Digikey, ComponentLink12URL=https://datasheet.ciiva.com/915/bat54lt1-d-915395.pdf?src-supplier=Digikey, Diode Element Material=SILICON, Diode Type=RECTIFIER, JEDEC-95 Code=TO-236, JESD-30 Code=R-PDSO-G3, JESD-609 Code=e3, Max Output current=200mA, Moisture Sensitivity Level=1, Number of Elements=1, Pins=3, Pricing="1=0.13, 10=0.095, 100=0.0511, 500=0.04014, 1000=0.02788 (USD)", Qualification Status="Not Qualified", Reach SVHC Compliant=Yes, Reverse Recovery Time-Max=0.005us, RoHS=Yes, RoHS Compliant=Yes, Stock=189870, Supplier=Digikey, Surface Mount=Yes, Technology=SCHOTTKY, Terminal Finish=Tin, Terminal Form="Gull Wing", Terminal Position=DUAL
D3 D4: library part D_TVS_7A, "TVS DIODE 5VWM 12VC SOD723", Breakdown Voltage=5V, Clamping Voltage=12V, Clamping Voltage-Max=12.5V, Leakage Current=100nA, Manufacturer=Littelfuse, Manufacturer Part Number=SP1003-01DTG, Max Operating Temperature=85°C, Max Surge Current=7A, Min Breakdown Voltage=6V, Min Operating Temperature=-40°C, Package Quantity=8000, Power Line Protection=No, Supplier Part Number=F3377CT-ND, Test Current=1mA, Category="TVS Diodes", ComponentLink1Description=https://datasheet.ciiva.com/8062/littelfuse-spa-sp1003-series-8062432.pdf?src-supplier=Element14, ComponentLink1URL=https://datasheet.ciiva.com/8062/littelfuse-spa-sp1003-series-8062432.pdf?src-supplier=Element14, ComponentLink2Description=https://datasheet.ciiva.com/5771/littelfuse-spa-sp1003-series-5771141.pdf?src-supplier=Farnell, ComponentLink2URL=https://datasheet.ciiva.com/5771/littelfuse-spa-sp1003-series-5771141.pdf?src-supplier=Farnell, ComponentLink3Description=https://datasheet.ciiva.com/330/littelfuse-tvs-diode-array-sp1003-datasheet-pdf-330691.pdf?src-supplier=Digikey, ComponentLink3URL=https://datasheet.ciiva.com/330/littelfuse-tvs-diode-array-sp1003-datasheet-pdf-330691.pdf?src-supplier=Digikey, ComponentLink4Description=https://datasheet.ciiva.com/330/littelfuse-tvs-diode-array-sp1003-datasheet-pdf-330692.pdf?src-supplier=Digikey, ComponentLink4URL=https://datasheet.ciiva.com/330/littelfuse-tvs-diode-array-sp1003-datasheet-pdf-330692.pdf?src-supplier=Digikey, ComponentLink5Description=https://datasheet.ciiva.com/330/littelfuse-tvs-diode-array-sp1003-datasheet-pdf-330693.pdf?src-supplier=Digikey, ComponentLink5URL=https://datasheet.ciiva.com/330/littelfuse-tvs-diode-array-sp1003-datasheet-pdf-330693.pdf?src-supplier=Digikey, Diode Type=ZENER, Direction=Unidirectional, Lead Free="Lead Free", Mounting Technology="Surface Mount", Number of Channels=1, Number of Elements=1, Number of Unidirectional Channels=1, Operating Supply Voltage=5V, Packaging="Tape and Reel", Peak Pulse Current=7A, Pins=2, Polarity=Bidirectional,Unidirectional, Pricing="1=0.53, 10=0.41, 100=0.2459, 500=0.22772, 1000=0.15485, 2000=0.14255 (USD)", Reach SVHC Compliant=No, Reverse Breakdown Voltage=6V, Reverse Standoff Voltage=5V, RoHS=Yes, RoHS Compliant=Yes, Series="SP1003, SPA®", Stock=109631, Supplier=Digikey, Termination=SMD/SMT
FB1 FB2 FB3: library part BLM18SG700TN1D, "Ferrite Chip, 1 Function(s), 4A, 2 Pin(s)", Case Code=0603, Clock Frequency=100MHz, Current Rating=4A, DC Resistance-Max=20mR, Manufacturer=Murata, Max Operating Temperature=125°C, Min Operating Temperature=-55°C, Supplier Part Number=490-5224-1-ND, Category="Ferrite Beads and Chips", Channels=1, ComponentLink1Description=https://datasheet.ciiva.com:443/pdfs/VipMasterIC/IC/MURE/MURE-S-A0008515766/MURE-S-A0008515869-1.pdf?src-supplier=IHS+Markit, ComponentLink1URL=https://datasheet.ciiva.com:443/pdfs/VipMasterIC/IC/MURE/MURE-S-A0008515766/MURE-S-A0008515869-1.pdf?src-supplier=IHS+Markit, ComponentLink2Description=https://datasheet.ciiva.com/41449/001171727-da-01-en-chip-drossel0603-70r-4000ma-1-6x0-8mm-41449356.pdf?src-supplier=Conrad, ComponentLink2URL=https://datasheet.ciiva.com/41449/001171727-da-01-en-chip-drossel0603-70r-4000ma-1-6x0-8mm-41449356.pdf?src-supplier=Conrad, ComponentLink3Description=https://datasheet.ciiva.com/41449/001172316-da-01-en-drossel-0603-70r-1-6x0-8mm-10000st-41449678.pdf?src-supplier=Conrad, ComponentLink3URL=https://datasheet.ciiva.com/41449/001172316-da-01-en-drossel-0603-70r-1-6x0-8mm-10000st-41449678.pdf?src-supplier=Conrad, ComponentLink4Description=https://datasheet.ciiva.com/8021/5151-8021530.pdf?src-supplier=Element14, ComponentLink4URL=https://datasheet.ciiva.com/8021/5151-8021530.pdf?src-supplier=Element14, ComponentLink5Description=https://datasheet.ciiva.com/14122/blm-series-eng-tds-14122901.pdf?src-supplier=Distrelec, ComponentLink5URL=https://datasheet.ciiva.com/14122/blm-series-eng-tds-14122901.pdf?src-supplier=Distrelec, ComponentLink6Description=https://datasheet.ciiva.com/8021/5151-8021529.pdf?src-supplier=Element14, ComponentLink6URL=https://datasheet.ciiva.com/8021/5151-8021529.pdf?src-supplier=Element14, ComponentLink7Description=https://datasheet.ciiva.com/6212/l0110s0100blm18s-6212357.pdf?src-supplier=Digikey, ComponentLink7URL=https://datasheet.ciiva.com/6212/l0110s0100blm18s-6212357.pdf?src-supplier=Digikey, Construction="Chip Bead", Filter Type="FERRITE CHIP", Height=0.5mm, JESD-609 Code=e3, Length=1.6mm, Manufacturer Part Number=BLM18SG700TN1D, Material=Ferrite, Min Frequency=100MHz, Mounting Technology="Surface Mount", Output Impedance=70R, Packaging="Tape and Reel", Pricing="1=0.13, 10=0.109, 25=0.0848, 50=0.0702, 100=0.0605, 250=0.0484, 500=0.04356, 1000=0.03631, 5000=0.03389 (USD)", Reach SVHC Compliant=Yes, RoHS=Yes, RoHS Compliant=Yes, Stock=330015, Supplier=Digikey, Terminal Finish=Tin, Width=0.8mm
H1: library part "Debug Connector Mini SWD - 0.05\"", "Mini SWD 0.05\" Pitch Connector - 10 Pin SMT Box Header", Manufacturer="Adafruit Industries", Manufacturer Part Number=4048, Category=Connectors, ComponentLink1Description=https://media.digikey.com/pdf/Data%20Sheets/Adafruit%20PDFs/4048_Web.pdf?src-supplier=Digi-Key, ComponentLink1URL=https://media.digikey.com/pdf/Data%20Sheets/Adafruit%20PDFs/4048_Web.pdf?src-supplier=Digi-Key, Pricing 1="1=1.95000 (USD)", RoHS=No, Stock 1=201, Supplier 1=Digi-Key
INPUT_CURR_SENSE LOAD_CURR_SENSE: library part TP_2PIN_MALE, "Board Connector, 2 Contact(s), 1 Row(s), Male, Straight, 0.1 inch Pitch, Solder Terminal, Locking, Black Insulator, Plug", Contact Resistance=20mR, Dielectric Withstanding Voltage (AC)=500V, Flammability Rating="UL94 V-0", Insulation Color=Black, Insulation Resistance=1GR, Manufacturer="Wurth Electronics", Manufacturer Part Number=61300211121, Max Operating Temperature=125°C, Min Operating Temperature=-40°C, Rated Current (Signal)=3A, Supplier Part Number=732-5315-ND, Body Breadth=0.1inch, Body Depth=0.1inch, Body Length=0.2inch, Body/Shell Style=PLUG, Category="Headers and Wire Housings", ComponentLink1Description=https://datasheet.ciiva.com:443/pdfs/VipMasterIC/IC/MIDC/MIDCS07676/MIDCS07676-1.pdf?src-supplier=IHS+Markit, ComponentLink1URL=https://datasheet.ciiva.com:443/pdfs/VipMasterIC/IC/MIDC/MIDCS07676/MIDCS07676-1.pdf?src-supplier=IHS+Markit, ComponentLink2Description=https://datasheet.ciiva.com/13619/6130xx11121-48870-13619345.pdf?src-supplier=Mouser, ComponentLink2URL=https://datasheet.ciiva.com/13619/6130xx11121-48870-13619345.pdf?src-supplier=Mouser, Connector Type="BOARD CONNECTOR", Contact Finish - Mating=GOLD, Contact Finish - Termination="Gold (Au) - with Nickel (Ni) barrier", Contact Gender=Male, Contact Material="Copper Alloy", Contact Pattern=RECTANGULAR, Contact Style="SQ PIN-SKT", DIN Conformance=No, Filter Feature=No, IEC Conformance=No, Insulation Material=Polybutylene, JESD-609 Code=e4, Mating Contact Pitch=0.1inch, MIL Conformance=No, Mixed Contacts=No, Mounting Option 1=LOCKING, Mounting Style=STRAIGHT, Mounting Technology=Board, Number Of Connectors=1, Number of Contacts=2, Number of Rows Loaded=1, Option="General Purpose", PCB Contact Pattern=RECTANGULAR, Pricing="1=0.13, 10=0.113, 25=0.094, 50=0.079, 100=0.071, 1000=0.065 (USD)", Reach SVHC Compliant=Yes, Reference Standard=UL, Reliability=COMMERCIAL, RoHS=Yes, RoHS Compliant=Yes, Stock=151065, Supplier=Digikey, Terminal Length=0.118inch, Terminal Pitch=2.54mm, Termination=Solder
J1: library part "USB-C Power Connector", "USB-C (USB TYPE-C) Receptacle Connector 24 (6+18 Dummy) Position Surface Mount, Right Angle; Through Hole", Manufacturer Part Number=USB4125-GF-A_REVA2, Package=None, Availability=Unavailable, Price=None